# EAGLE board 14145^2 (EAGLE 7.5.0)
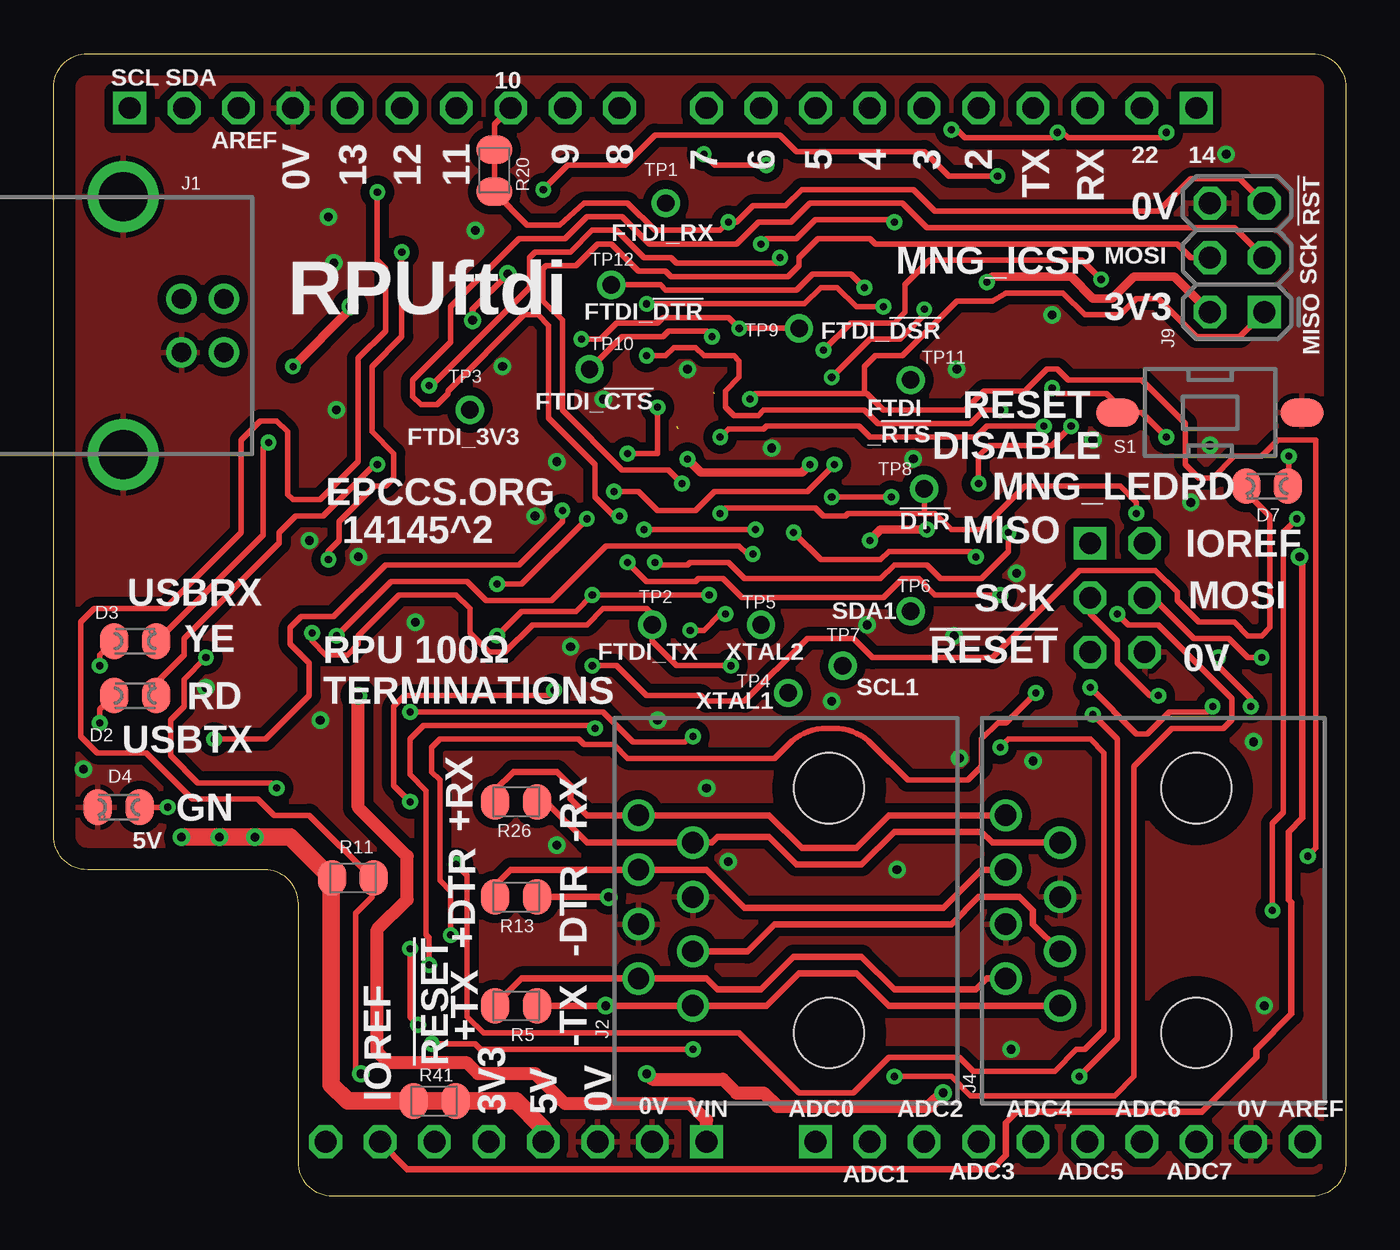
[diagram p0: board, top side]
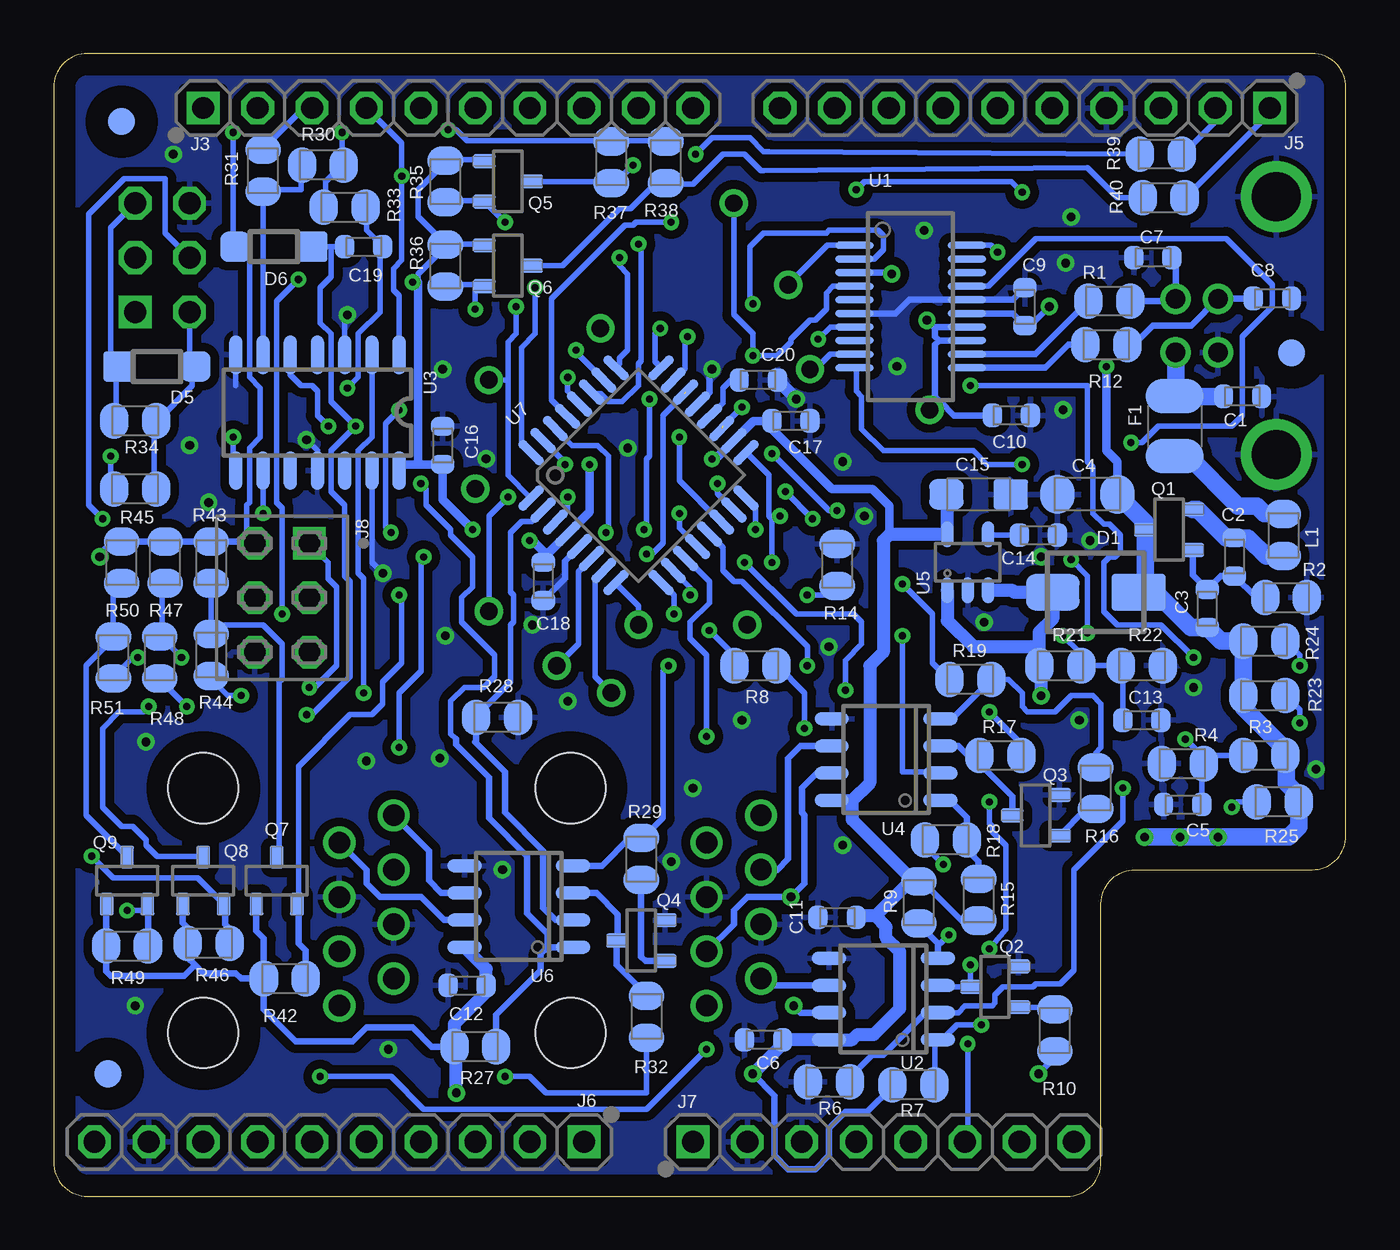
[diagram p1: board, bottom side, seen from below]

Size 60.33 x 53.34 mm. Coordinates in mm from the lower left corner, seen from the top.
Outline: 60.33,51.75 60.33,1.59 arc-90 58.74,0 13.02,0 arc-90 11.43,1.59 11.43,13.65 arc90 9.84,15.24 1.59,15.24 arc-90 0,16.83 0,51.75 arc-90 1.59,53.34 58.74,53.34 arc-90 60.33,51.75
Copper layers (1*16): Top 0.034290625mm / dielectric 60mil / Bottom 0.034290625mm
Design rules "default *": minimum track width 10mil, minimum drill 13mil, track to track 8mil, track to pad 8mil, pad to pad 8mil, via to via 8mil, smd to smd 8mil, copper to edge 40mil, drill to drill 12mil, minimum pad ring 10mil, minimum via ring 8mil, stop-mask expansion 4mil, vias tented up to drill 17mil, thermal gap 10mil
Net classes: 0 default: width 0.254 mm, drill 0.33 mm

## Footprints (pad centres in the part's own frame; a part is rotated, then mirrored left to right if it is on the bottom)
C0603(1608) = smd 0.898 x 1.1: 1 -0.889,0; 2 0.889,0
C1206(3216) = smd 1.6 x 1.8: 1 -1.4,0; 2 1.4,0
3216 = smd 1.6 x 1.4: + -1.5,0; - 1.5,0
SMA = smd 2.5 x 1.7: A 2,0; K -2,0
C0805(2012) = smd 1.321 x 1.651: A 0.977,0; K -0.977,0
SOD123 = smd 1.4 x 1.4: A 1.8,0; C -1.8,0
C1210(3225) = smd 1.6 x 2.7: 1 -1.4,0; 2 1.4,0
USB-B-PTH = drill 0.914: 1 1.981,-1.25; 2 1.981,1.25; 3 0,1.25; 4 0,-1.25 | drill 2.286: S1 -2.718,-6.02; S2 -2.718,6.02
RJ45-8HZT = drill 1: 1 -4.445,6.35; 2 -3.175,8.89; 3 -1.905,6.35; 4 -0.635,8.89; 5 0.635,6.35; 6 1.905,8.89; 7 3.175,6.35; 8 4.445,8.89 | hole 3.264: -5.715,0; 5.715,0
1X10 = drill 1.016 square: 1 0,0 | drill 1.016 octagon: 2 2.54,0; 3 5.08,0; 4 7.62,0; 5 10.16,0; 6 12.7,0; 7 15.24,0; 8 17.78,0; 9 20.32,0; 10 22.86,0
1X8 = drill 1.016 square: 1 0,0 | drill 1.016 octagon: 2 2.54,0; 3 5.08,0; 4 7.62,0; 5 10.16,0; 6 12.7,0; 7 15.24,0; 8 17.78,0
F2X3 = drill 1.016 square: 1 0,0 | drill 1.016 octagon: 2 0,-2.54; 3 2.54,0; 4 2.54,-2.54; 5 5.08,0; 6 5.08,-2.54
ISP = drill 1.016 square: 1 0,0 | drill 1.016 octagon: 2 0,2.54; 3 2.54,0; 4 2.54,2.54; 5 5.08,0; 6 5.08,2.54
C0805(2012)' = smd 1.321 x 1.651: 1 -0.977,0; 2 0.977,0
SOT23 = smd 0.65 x 1.06: 1(G) -0.95,-1.1; 2(S) 0.95,-1.1; 3(D) 0,1.1
SMD-DIPSWITCH-1 = smd 1.3 x 2: 1 0,-4.3; 2 0,4.3
P1-08 = drill 0.813: TP 0,0
20SSOP = smd 0.33 x 1.8: 1 -2.857,-2.625; 2 -2.223,-2.625; 3 -1.587,-2.625; 4 -0.953,-2.625; 5 -0.318,-2.625; 6 0.318,-2.625; 7 0.953,-2.625; 8 1.587,-2.625; 9 2.223,-2.625; 10 2.857,-2.625; 11 2.857,2.625; 12 2.223,2.625; 13 1.587,2.625; 14 0.953,2.625; 15 0.318,2.625; 16 -0.318,2.625; 17 -0.953,2.625; 18 -1.587,2.625; 19 -2.223,2.625; 20 -2.857,2.625
SOIC8 = smd 0.6 x 1.6: 1 -1.905,-2.54; 2 -0.635,-2.54; 3 0.635,-2.54; 4 1.905,-2.54; 5 1.905,2.54; 6 0.635,2.54; 7 -0.635,2.54; 8 -1.905,2.54
14SOIC = smd 0.6 x 1.8: 1 -3.81,-2.7; 2 -2.54,-2.7; 3 -1.27,-2.7; 4 0,-2.7; 5 1.27,-2.7; 6 2.54,-2.7; 7 3.81,-2.7; 8 3.81,2.7; 9 2.54,2.7; 10 1.27,2.7; 11 0,2.7; 12 -1.27,2.7; 13 -2.54,2.7; 14 -3.81,2.7
SOT23-5,SOT25 = smd 0.55 x 1.2: 1 -0.95,-1.3; 2 0,-1.3; 3 0.95,-1.3; 4 0.95,1.3; 5 -0.95,1.3
TQFP32-08 = smd 1.5 x 0.45: 1 -4.293,2.8; 2 -4.293,2; 3 -4.293,1.2; 4 -4.293,0.4; 5 -4.293,-0.4; 6 -4.293,-1.2; 7 -4.293,-2; 8 -4.293,-2.8; 17 4.293,-2.8; 18 4.293,-2; 19 4.293,-1.2; 20 4.293,-0.4; 21 4.293,0.4; 22 4.293,1.2; 23 4.293,2; 24 4.293,2.8 | smd 0.45 x 1.5: 9 -2.8,-4.293; 10 -2,-4.293; 11 -1.2,-4.293; 12 -0.4,-4.293; 13 0.4,-4.293; 14 1.2,-4.293; 15 2,-4.293; 16 2.8,-4.293; 25 2.8,4.293; 26 2,4.293; 27 1.2,4.293; 28 0.4,4.293; 29 -0.4,4.293; 30 -1.2,4.293; 31 -2,4.293; 32 -2.8,4.293
FIDUCIAL-1.27 = smd 1.27 x 1.27: 1 0,0

## Placement (x,y rotation side)
C1  0.1uF  [C0603(1608)]  4.83,37.34 0 bottom
C2  0.1uF  [C0603(1608)]  5.21,29.84 270 bottom
C3  0.022uF  [C0603(1608)]  6.48,27.43 90 bottom
C4  4.7uF  [C1206(3216)]  12.06,32.77 180 bottom
C5  0.1uF  [C0603(1608)]  7.62,18.29 180 bottom
C6  .1uF  [C0603(1608)]  27.18,7.3 180 bottom
C7  47pF  [C0603(1608)]  9.02,43.81 180 bottom
C8  47pF  [C0603(1608)]  3.43,41.91 0 bottom
C9  0.1uF  [C0603(1608)]  14.99,41.53 90 bottom
C10  0.1uF  [C0603(1608)]  15.62,36.45 0 bottom
C11  .1uF  [C0603(1608)]  23.75,13.02 180 bottom
C12  .1uF  [C0603(1608)]  41.02,9.84 180 bottom
C13  0.1uF  [C0603(1608)]  9.53,22.23 0 bottom
C14  470pF  [C0603(1608)]  14.35,30.86 0 bottom
C15  10uF  [3216]  17.14,32.77 0 bottom
C16  .1uF  [C0603(1608)]  42.16,35.05 90 bottom
C17  .1uF  [C0603(1608)]  25.91,36.2 0 bottom
C18  .1uF  [C0603(1608)]  37.47,28.7 270 bottom
C19  .1uF  [C0603(1608)]  45.85,44.32 180 bottom
C20  .1uF  [C0603(1608)]  27.43,38.1 0 bottom
D1  SQ4  [SMA]  11.68,28.19 0 bottom
D2  0805RD  [C0805(2012)]  3.81,23.37 180 top
D3  0805YE  [C0805(2012)]  3.81,25.91 180 top
D4  0805GN  [C0805(2012)]  3.05,18.16 0 top
D5  T4  [SOD123]  55.5,38.73 180 bottom
D6  T4  [SOD123]  50.04,44.32 0 bottom
D7  0805RD  [C0805(2012)]  56.64,33.15 0 top
F1  M  [C1210(3225)]  8,35.94 270 bottom
J1  B  [USB-B-PTH]  5.97,40.64 0 top
J2  RJ45J  [RJ45-8HZT]  36.2,13.34 90 top
J3  PBC10SAAN  [1X10]  53.34,50.8 0 bottom
J4  RJ45J  [RJ45-8HZT]  53.34,13.34 90 top
J5  PBC10SAAN  [1X10]  3.56,50.8 180 bottom
J6  PBC10SAAN  [1X10]  35.56,2.54 180 bottom
J7  PBC08SAAN  [1X8]  30.48,2.54 0 bottom
J8  PPPC032LFBN  [F2X3]  48.39,30.48 270 bottom
J9  [ISP]  56.52,41.27 90 top
L1  MH2029-300Y  [C0805(2012)']  2.92,30.86 270 bottom
Q1  DMB  [SOT23]  8.26,31.11 90 bottom
Q2  K38  [SOT23]  16.38,9.78 90 bottom
Q3  K38  [SOT23]  14.48,17.78 90 bottom
Q4  K38  [SOT23]  32.89,11.94 90 bottom
Q5  K38  [SOT23]  39.12,47.37 270 bottom
Q6  K38  [SOT23]  39.12,43.43 270 bottom
Q7  K38  [SOT23]  49.91,14.73 0 bottom
Q8  K38  [SOT23]  53.34,14.73 0 bottom
Q9  K38  [SOT23]  56.9,14.73 0 bottom
R1  27  [C0805(2012)']  11.05,41.78 180 bottom
R2  5.62k  [C0805(2012)']  2.79,27.94 0 bottom
R3  100k  [C0805(2012)']  3.81,20.57 0 bottom
R4  10k  [C0805(2012)']  7.62,20.19 180 bottom
R5  100  [C0805(2012)']  21.59,8.89 0 top
R6  3.01k  [C0805(2012)']  24.13,5.33 0 bottom
R7  10k  [C0805(2012)']  20.19,5.21 180 bottom
R8  3.01k  [C0805(2012)']  27.56,24.77 180 bottom
R9  10K  [C0805(2012)']  19.94,13.72 270 bottom
R10  100  [C0805(2012)']  13.59,7.75 270 bottom
R11  OPEN  [C0805(2012)']  13.97,14.86 0 top
R12  27  [C0805(2012)']  11.18,39.75 180 bottom
R13  100  [C0805(2012)']  21.59,13.97 0 top
R14  3.01k  [C0805(2012)']  23.75,29.46 270 bottom
R15  10k  [C0805(2012)']  17.14,13.84 270 bottom
R16  100  [C0805(2012)']  11.68,19.05 90 bottom
R17  3.01k  [C0805(2012)']  16.13,20.57 0 bottom
R18  1.5k  [C0805(2012)']  18.67,16.64 180 bottom
R19  1.5k  [C0805(2012)']  17.53,24.13 180 bottom
R20  JMP  [C0805(2012)']  20.57,47.88 90 top
R21  200k  [C0805(2012)']  13.34,24.77 0 bottom
R22  10k  [C0805(2012)']  9.53,24.77 0 bottom
R23  1.5k  [C0805(2012)']  3.81,23.37 180 bottom
R24  1.5k  [C0805(2012)']  3.81,25.91 180 bottom
R25  1.5k  [C0805(2012)']  3.17,18.41 0 bottom
R26  100  [C0805(2012)']  21.59,18.41 0 top
R27  10k  [C0805(2012)']  40.64,6.99 180 bottom
R28  3.01k  [C0805(2012)']  39.62,22.35 0 bottom
R29  100  [C0805(2012)']  32.89,15.75 270 bottom
R30  10K  [C0805(2012)']  47.75,48.13 180 bottom
R31  180  [C0805(2012)']  50.55,47.88 270 bottom
R32  3.01k  [C0805(2012)']  32.64,8.38 90 bottom
R33  100k  [C0805(2012)']  46.74,46.16 180 bottom
R34  10K  [C0805(2012)']  56.52,36.2 0 bottom
R35  10k  [C0805(2012)']  42.04,47.37 270 bottom
R36  10k  [C0805(2012)']  42.04,43.43 270 bottom
R37  10k  [C0805(2012)']  34.29,48.26 270 bottom
R38  10k  [C0805(2012)']  31.75,48.26 270 bottom
R39  180  [C0805(2012)']  8.64,48.64 0 bottom
R40  180  [C0805(2012)']  8.51,46.61 0 bottom
R41  JMP  [C0805(2012)']  17.78,4.45 180 top
R42  10k  [C0805(2012)']  49.53,10.16 0 bottom
R43  10k  [C0805(2012)']  52.96,29.59 270 bottom
R44  180  [C0805(2012)']  52.96,25.27 270 bottom
R45  1.5k  [C0805(2012)']  56.52,33.02 180 bottom
R46  10k  [C0805(2012)']  53.09,11.81 0 bottom
R47  10k  [C0805(2012)']  55.12,29.59 270 bottom
R48  180  [C0805(2012)']  55.37,25.15 270 bottom
R49  10k  [C0805(2012)']  56.9,11.68 0 bottom
R50  10k  [C0805(2012)']  57.15,29.59 270 bottom
R51  180  [C0805(2012)']  57.53,25.15 270 bottom
S1  SMDIP1S  [SMD-DIPSWITCH-1]  53.98,36.58 90 top
TP1  TPPAD1-08  [P1-08]  28.57,46.35 0 top
TP2  TPPAD1-08  [P1-08]  27.94,26.67 0 top
TP3  TPPAD1-08  [P1-08]  19.43,36.7 0 top
TP4  TPPAD1-08  [P1-08]  34.29,23.5 0 top
TP5  TPPAD1-08  [P1-08]  33.02,26.67 0 top
TP6  TPPAD1-08  [P1-08]  40.01,27.3 0 top
TP7  TPPAD1-08  [P1-08]  36.83,24.77 0 top
TP8  TPPAD1-08  [P1-08]  40.64,33.02 0 top
TP9  TPPAD1-08  [P1-08]  34.8,40.51 0 top
TP10  TPPAD1-08  [P1-08]  25.02,38.61 0 top
TP11  TPPAD1-08  [P1-08]  40.01,38.1 0 top
TP12  TPPAD1-08  [P1-08]  26.04,42.55 0 top
U1  FT231X  [20SSOP]  20.32,41.53 270 bottom
U2  3172EIBZ  [SOIC8]  21.59,9.21 90 bottom
U3  74LVC07A  [14SOIC]  48.01,36.58 180 bottom
U4  3172EIBZ  [SOIC8]  21.46,20.38 90 bottom
U5  KB33  [SOT23-5,SOT25]  17.65,29.59 0 bottom
U6  3172EIBZ  [SOIC8]  38.61,13.53 90 bottom
U7  ATMEGA328P-AU  [TQFP32-08]  33.02,33.66 45 bottom
U$1  ARDUINO-UNO  [ARDUINO_UNO]  -15.24,0 0 top  (outside the outline)
U$2  FIDUCIAL1.27  [FIDUCIAL-1.27]  57.15,50.16 0 bottom
U$3  FIDUCIAL1.27  [FIDUCIAL-1.27]  2.54,39.37 0 bottom
U$4  FIDUCIAL1.27  [FIDUCIAL-1.27]  57.78,5.71 0 bottom

## Library data of the parts
C1-C14 C16-C20 = C-C
C15 = C-T
D1 = D-SBR
D2-D4 D7 = D-LED
D5 D6 = D-GP
F1 = F-RST
J1 = J-USB
J2 J4 = J-RJ45
J3 J5-J8 = J-HDR2.54mm
J9 U7 = U-AVR
L1 = L-FB
Q1 = Q-PCH
Q2-Q9 = Q-NCH
R1-R51 = R-C
S1 = S-Toggle
TP1-TP12 = J-TP
U1 U2 U4 U6 = U-Transceiver
U3 = U-7400
U5 = P-DCDC
U$1 = J-BoardHDR
U$2-U$4 = H-Fiducial

## Nets
0V: C1.2 C4.2 C5.2 C6.2 C7.2 C8.2 C9.2 C10.2 C11.2 C12.2 C13.2 C14.2 C15.- C16.2 C17.2 C18.2 C20.2 D4.K J1.4 J1.S1 J1.S2 J2.4 J2.5 J4.4 J4.5 J5.4 J6.9 J7.2 J7.3 J8.6 J9.6 Q2.2(S) Q3.2(S) Q4.2(S) R2.2 R4.2 R6.1 R14.1 R22.2 R28.2 S1.1 U1.6 U1.16 U2.5 U3.3 U3.7 U3.11 U3.13 U4.5 U5.2 U6.5 U7.5 U7.21
!DTR!: TP8.TP U3.9 U7.12
+3V3: C6.1 C11.1 C12.1 C15.+ C16.1 C17.1 C18.1 D5.C J9.2 Q5.1(G) Q6.1(G) Q7.1(G) Q8.1(G) Q9.1(G) R7.2 R9.1 R15.2 R27.2 R34.2 R35.1 R36.1 R42.1 R45.1 R46.1 R49.1 U2.8 U3.14 U4.8 U5.5 U6.8 U7.4 U7.18
+5V: C3.1 C4.1 C9.1 D1.A J7.4 Q1.3(D) R3.2 R11.1 R23.2 R24.2 R25.2 R41.1 R41.2 U1.15
+DTR: J2.6 J4.6 R13.1 U4.6
+RX: J2.8 J4.8 R26.1 U6.6
+TX: J2.2 J4.2 R5.1 U2.6
-DTR: J2.3 J4.3 R13.2 U4.7
-RX: J2.7 J4.7 R26.2 U6.7
-TX: J2.1 J4.1 R5.2 U2.7
BRD_MISO: J8.1 R48.2
BRD_MOSI: J8.4 R51.2
BRD_SCK: J8.3 R44.2
CCRST: C19.1 R33.1 S1.2 U3.8
D+: C8.1 J1.3 R12.1
D-: C7.1 J1.2 R1.1
DTR_!RE: R14.2 U4.2 U7.10
DTR_DE: R17.2 U7.11
DTR_RXD: R18.2 U7.30
DTR_TXD: R19.2 U7.31
FT3V3: C10.1 TP3.TP U1.3 U1.13 U1.14
FTDI_!CTS: TP10.TP U1.9 U7.23
FTDI_!DSR: TP9.TP U1.7 U7.24
FTDI_!DTR: TP12.TP U1.1 U7.32
FTDI_!RTS: TP11.TP U1.2 U7.1
FTDI_RX: R7.1 TP1.TP U1.4 U2.1
FTDI_TX: R29.1 TP2.TP U1.20 U6.4
IOREF: D6.C J7.7 J8.2 R30.1 R33.2 R37.1 R38.1 R43.1 R47.1 R50.1
LED_BUILTIN: D7.K U7.13
MGR_!RESET: D5.A J5.8 J9.5 R20.1 R20.2 R34.1 U7.29
MISO: J9.1 Q8.2(S) R46.2 U7.16
MOSI: J9.4 Q9.2(S) R49.2 U7.15
N$1: Q6.3(D) R38.2 R40.1
N$2: Q5.3(D) R37.2 R39.1
N$3: TP4.TP U7.7
N$4: C1.1 F1.1 J1.1
N$5: F1.2 L1.1
N$6: D3.A R24.1
N$7: D2.K U1.10
N$8: D3.K U1.17
N$9: TP5.TP U7.8
N$10: R30.2 R31.2 U3.6
N$11: Q4.3(D) R32.2 U6.3
N$12: R1.2 U1.12
N$13: R12.2 U1.11
N$14: D4.A R25.1
N$15: Q2.1(G) R10.1
N$16: D2.A R23.1
N$18: Q2.3(D) R8.1 U2.3
N$19: R15.1 R18.1 U4.1
N$20: Q3.3(D) R17.1 U4.3
N$21: R16.2 R19.1 U4.4
N$22: Q3.1(G) R16.1
N$23: Q7.3(D) R43.2 R44.1
N$24: C14.1 U5.4
N$25: Q4.1(G) R29.2
N$26: C2.1 L1.2 Q1.2(S)
N$27: C2.2 C3.2 Q1.1(G) R2.1
N$29: D7.A R45.2
N$30: Q9.3(D) R50.2 R51.1
N$33: Q8.3(D) R47.2 R48.1
RPU_AREF: C20.1 U7.20
RX: J3.3 R31.1
RX_!RE: R28.1 U6.2 U7.2
RX_DE: R32.1 U7.26
RX_RPU: R27.1 U3.5 U6.1
SCK: J9.3 Q7.2(S) R42.2 U7.17
SCL: J5.1 R40.2
SCL0: Q6.2(S) R36.2 U7.28
SCL1: TP7.TP U7.6
SDA: J5.2 R39.2
SDA0: Q5.2(S) R35.2 U7.27
SDA1: TP6.TP U7.3
SS: C19.2 D6.A J7.6 U7.14
TX: J3.4 R10.2 R11.2 U3.1
TX_!RE: R6.2 U2.2 U7.25
TX_DE: R8.2 U7.9
TX_RPU: R9.2 U2.4 U3.2
USB5V_ADC6: C5.1 R3.1 R4.1 U7.19
VIN: D1.K J7.1 R21.1 U5.1 U5.3
VIN_ADC7: C13.1 R21.2 R22.1 U7.22

## Tracks (layer width: path | path; a pad name or v marks a point on that pad's centre or on a via)
0V  (via drill 0.41)
  Bottom 0.254: U3.7 51.82,37.85 | U3.3 46.74,41.02 v46.61,41.15 | U3.11 48.01,34.8 v48.51,35.31 | U3.13 45.47,29.59 v44.96,29.08
  Bottom 0.305: C9.2 15.56,41.85 U1.16 20.38,41.85 21.02,41.21 U1.6 | U7.5 36.45,29.66 36.45,28.83 C18.2 | U7.21 29.72,37.52 29.72,38.48 v29.59,38.61
  Bottom 0.61: C20.2 v25.65,37.21
  other vias: 14.22,29.84 16.89,26.8 12.45,22.23 13.21,36.7 11.94,30.61 7.11,23.75 20.95,38.73 23.5,34.29 22.48,31.75 12.83,45.72 19.68,45.09 1.4,19.94 24.13,25.65 28.19,22.23 37.97,26.67 30.48,19.05 36.32,23.11 42.29,20.45 45.72,20.32 39.37,15.24 56.52,8.89 56.01,21.21 53.98,35.05 54.74,48.64 53.09,32.38 42.16,38.61 42.04,26.16 40.13,34.42 33.53,34.92 13.08,43.56 31.5,15.62 23.5,16.38 44.7,6.86
  pour Top (isolate 0.406): 10.79,0 10.79,14.61 0,14.61 0,53.34 60.33,53.34 60.33,0
  pour Bottom (isolate 0.406): 0,53.34 60.33,53.34 60.33,0 10.79,0 10.79,14.61 0,14.61
!DTR!  (via drill 0.33)
  Top 0.254: v50.55,31.88 50.55,32.38 49.78,33.15 45.34,33.15 43.31,31.11 41.91,31.11 41.15,31.88 40.64,31.88 | 40.64,31.88 37.08,31.88 36.96,31.75 35.94,31.75 35.56,32.13 31.37,32.13 v31.11,31.88 | TP8.TP 40.64,31.88
  Bottom 0.254: U3.9 v50.55,31.88 | U7.12 31.11,31.18 v31.11,31.88
+3V3  (via drill 0.33, 0.41)
  Top 0.406: v38.1,30.61 38.61,31.11 v40.77,31.11 | v43.56,42.67 43.81,42.93 47.5,42.93 48.51,41.91 49.4,41.91 50.42,42.93 52.32,42.93 J9.2 | v29.59,34.42 30.23,33.78 34.92,33.78 v35.31,34.16
  Top 0.61: v27.69,5.71 27.94,5.46 31.24,5.46 31.88,4.83 33.15,4.83 33.78,4.19 40.89,4.19 v41.53,4.83
  Bottom 0.254: R45.1 55.63,33.02 55.63,36.2 R34.2 55.5,36.2 53.85,37.85 53.85,38.73 D5.C 53.72,38.73 53.98,38.99 J9.2 | 42.04,44.45 40.26,44.45 Q6.1(G) | Q5.1(G) 40.26,48.39 42.04,48.39 R35.1 42.04,48.26 43.31,46.99 43.31,45.72 42.04,44.45 | 42.04,44.45 R36.1 42.04,44.32 43.31,43.05 43.31,42.67 | U3.14 44.2,34.16 | 37.34,29.97 37.21,29.84 C18.1
  Bottom 0.305: R27.2 42.67,6.99 43.56,7.87 45.72,7.87 46.35,7.24 49.02,7.24 50.51,8.72 R42.1 | R42.1 50.51,12.03 50.86,12.38 Q7.1(G) | 53.72,10.79 54.06,11.14 R46.1 54.06,12.53 54.29,12.76 Q8.1(G) | 53.72,10.79 53.34,10.41 51.82,10.41 51.56,10.16 R42.1 | 53.72,10.79 54.23,10.29 57.66,10.29 57.87,10.5 R49.1 57.87,13.61 Q9.1(G) | R9.1 19.77,14.69 17.91,12.83 17.18,12.83 R15.2 | R7.2 21.17,5.12 22.35,3.94 23.37,3.94 24.13,3.17 24.13,1.91 24.77,1.27 26.04,1.27 26.67,1.91 26.67,4.7 v27.69,5.71 | 37.27,29.97 37.34,29.97
  Bottom 0.406: 21.31,30.89 21.31,32.23 22.1,33.02 24,33.02 26.8,35.81 C17.1 27.65,36.2 U7.18 29.43,34.42 v29.59,34.42 | 44.2,34.16 43.31,34.16 | 43.31,34.16 C16.1 42.16,32.51 v40.77,31.11 | v38.1,30.61 37.97,30.61 37.34,29.97 | 43.31,34.16 43.31,42.67 v43.56,42.67 | v35.31,34.16 35.31,31.93 U7.4 37.27,29.97
  Bottom 0.61: C15.+ 18.6,32.72 U5.5 21.31,30.89 21.59,30.61 21.59,25.4 22.23,24.77 22.23,19.3 23.05,18.48 | U4.8 23.05,18.48 | 23.05,18.48 23.05,17.59 20.15,14.69 | R9.1 20.15,14.69 | 20.15,14.69 20.36,14.69 21.97,13.08 | 21.97,13.08 22.8,13.08 C11.1 | 21.97,13.08 21.46,12.57 21.46,12.06 20.83,11.43 20.83,8.76 22.04,7.56 22.8,7.56 23.05,7.3 U2.8 C6.1 26.29,7.11 v27.69,5.71 | v41.53,4.83 41.53,6.9 R27.2 41.62,8.04 40.13,9.53 C12.1 40.13,10.6 U6.8
+5V  (via drill 0.33, 0.41)
  Top 0.254: 13.08,14.86 R11.1 12.95,14.86 | 13.84,41.4 v13.84,41.53
  Top 0.406: 13.84,41.4 v11.18,38.73
  Top 0.813: v5.97,16.76 v7.75,16.76 v9.4,16.76 11.05,16.76 12.95,14.86 12.95,5.21 13.72,4.45 R41.2 R41.1 21.59,4.45 22.86,3.17 J7.4
  Bottom 0.305: U1.15 15.56,41.21 C9.1 14.73,40.64 v13.84,41.53 | C4.1
  Bottom 0.406: v11.18,38.73 11.18,34.8 10.67,34.29 C4.1
  Bottom 0.813: v9.4,16.76 2.67,16.76 2.2,17.23 R25.2 2.2,18.71 2.79,19.3 2.79,20.45 2.83,20.49 R3.2 2.83,20.87 4.79,22.82 R23.2 R24.2 5.84,25.91 C3.1 7.24,26.54 8.89,28.19 9.14,28.19 | 9.14,28.19 D1.A | 9.14,28.19 9.36,28.41 Q1.3(D) 9.36,31.46 C4.1
+DTR
  Top 0.305: J4.6 43.31,15.24 41.53,13.46 32.26,13.46 30.48,15.24 J2.6 21.34,15.24 20.61,14.52 R13.1
  Bottom 0.305: U4.6 25.46,21.02 26.04,20.45 26.04,15.75 26.54,15.24 J2.6
+RX
  Top 0.305: J4.8 38.99,17.78 37.47,16.26 34.92,16.26 33.4,17.78 J2.8 24.89,17.78 24.13,18.54 24.13,19.18 23.5,19.81 21.46,19.81 20.61,18.96 R26.1
  Bottom 0.305: U6.6 42.23,14.16 42.8,14.73 42.8,16.13 J4.8
+TX
  Top 0.305: R5.1 20.61,8.93 21.84,10.16 J2.2 30.48,10.16 30.99,9.65 33.02,9.65 34.54,11.18 37.72,11.18 39.24,9.65 43.05,9.65 43.56,10.16 J4.2
  Bottom 0.305: U2.6 26.99,9.84 J2.2
-DTR  (via drill 0.41)
  Top 0.305: J4.3 45.72,12.7 45.72,13.34 45.09,13.97 43.18,13.97 41.91,12.7 33.66,12.7 32.38,11.43 J2.3 | R13.2 v25.91,13.97
  Bottom 0.305: U4.7 24.7,19.75 25.4,19.05 25.4,17.91 25.27,17.78 25.27,14.61 v25.91,13.97 27.94,13.97 28.57,13.34 28.57,12.7 J2.3
-RX
  Top 0.305: J4.7 43.81,16.51 43.31,17.02 39.24,17.02 37.72,15.49 34.67,15.49 33.4,16.76 30.99,16.76 30.73,16.51 J2.7 24.89,16.51 22.99,18.41 R26.2
  Bottom 0.305: U6.7 42.1,12.89 43.18,13.97 45.09,13.97 45.72,14.61 45.72,15.24 J4.7
-TX  (via drill 0.41)
  Top 0.305: R5.2 v25.78,8.89 J2.1 33.27,8.89 34.8,10.41 37.47,10.41 38.99,8.89 J4.1
  Bottom 0.305: U2.7 25.46,8.57 v25.78,8.89
BRD_MISO  (via drill 0.33)
  Top 0.254: v54.1,22.86 53.85,22.61 52.07,22.61 51.05,21.59 50.55,21.59 v48.39,23.75
  Bottom 0.254: v54.1,22.86 55.37,24.13 R48.2 | v48.39,23.75 48.13,23.75 47.12,24.77 47.12,28.45 47.5,28.83 47.5,29.59 J8.1
BRD_MOSI  (via drill 0.33)
  Top 0.254: v56.39,25.15 55.75,25.15 54.86,26.04 53.21,26.04 51.31,27.94 J8.4
  Bottom 0.254: v56.39,25.15 56.64,25.15 57.53,24.26 R51.2
BRD_SCK  (via drill 0.33)
  Top 0.254: v51.56,23.37 51.18,23.37 49.66,24.89 49.66,25.91 48.39,27.18 J8.3
  Bottom 0.254: R44.2 52.96,24.13 52.2,23.37 v51.56,23.37
CCRST  (via drill 0.33)
  Top 0.254: v51.94,35.43 50.8,36.58 S1.2 49.66,36.96 49.15,37.47 46.86,37.47 v46.61,37.72
  Bottom 0.254: R33.1 45.72,46.1 45.72,45.09 C19.1 45.09,44.32 45.09,41.27 46.1,40.26 46.1,38.23 v46.61,37.72 | v51.94,35.43 51.94,34.04 51.82,33.91 U3.8
D+
  Bottom 0.305: R12.1 9.91,39.75 9.02,40.64 7.22,40.64 J1.3 4.34,41.89 C8.1
D-
  Bottom 0.305: R1.1 8.06,41.78 J1.2 7.95,43.64 C7.1
DTR_!RE  (via drill 0.33)
  Top 0.254: v30.61,28.07 v25.15,28.07 24.38,27.3 21.84,27.3 v20.7,26.16
  Bottom 0.254: 30.61,28.32 v30.61,28.07 30.61,28.41 U7.10 | v25.15,28.07 23.75,28.07 R14.2 | v20.7,26.16 20.7,19.81 18.92,19.81 U4.2
DTR_DE  (via drill 0.33)
  Top 0.254: v16.64,22.61 25.65,22.61 27.05,21.21 29.46,21.21 29.72,21.46 v29.84,21.46
  Bottom 0.254: v29.84,21.46 29.84,25.27 30.61,26.04 30.61,26.8 29.72,27.69 29.72,28.7 30.73,29.72 U7.11 | v16.64,22.61 15.24,21.21 R17.2
  Bottom 0.305: R17.2 15.15,21.12
DTR_RXD  (via drill 0.33)
  Top 0.254: v34.54,30.99 35.81,29.72 38.61,29.72 38.99,30.1 42.8,30.1 v43.05,29.84 | v44.2,20.95 44.58,21.34 48.39,21.34 49.02,20.7 49.02,7.75 48.13,6.86 47.75,6.86 46.74,5.84 42.93,5.84 42.29,6.48 38.99,6.48 37.34,4.83 34.8,4.83 32,7.62 20.07,7.62 19.3,8.38 19.3,14.99 v18.8,15.49
  Bottom 0.254: v34.54,30.99 34.42,31.11 34.42,34.54 34.92,35.05 36.11,35.05 U7.30 | v43.05,29.84 43.18,29.72 43.18,24.51 44.2,23.5 v44.2,20.95 | v18.8,15.49 19.56,16.26 19.56,16.64 R18.2
DTR_TXD  (via drill 0.33)
  Top 0.254: v36.45,34.16 35.18,32.89 30.86,32.89 29.97,32 28.19,32 27.3,32.89 v26.16,32.89 | v24.89,31.62 21.84,28.57 v20.7,28.57
  Bottom 0.254: v24.89,31.62 v26.16,32.89 | v20.7,28.57 19.3,27.18 19.3,24.89 18.54,24.13 R19.2 | U7.31 36.45,34.26 v36.45,34.16
FT3V3  (via drill 0.41)
  Top 0.305: v19.56,40.89 19.56,41.4 v21.21,43.05
  Bottom 0.254: TP3.TP 19.3,36.7 18.92,37.08
  Bottom 0.305: C10.1 18.29,36.45 18.92,37.08 19.18,37.34 19.18,39.75 18.99,39.94 | U1.13 18.99,39.94 | U1.14 19.11,40.58 19.18,40.51 | 19.18,40.51 19.18,40.13 18.99,39.94 | 19.18,40.51 v19.56,40.89 | U1.3 21.27,43.12 v21.21,43.05
FTDI_!CTS  (via drill 0.33)
  Top 0.254: v30.73,40.13 30.48,40.39 28.7,40.39 28.45,40.13 26.54,40.13 TP10.TP
  Bottom 0.254: U7.23 30.86,38.64 30.86,40.01 v30.73,40.13 | U1.9 24.07,39.31 24.77,38.61 TP10.TP
FTDI_!DSR  (via drill 0.33)
  Top 0.254: v24.64,40.01 25.53,40.01 26.29,40.77 28.19,40.77 28.45,41.02 31.5,41.02 v32,40.51 TP9.TP
  Bottom 0.254: U7.24 32.26,38.96 32.26,40.26 v32,40.51 | U1.7 24.07,40.58 v24.64,40.01
FTDI_!DTR  (via drill 0.33)
  Top 0.254: TP12.TP 28.32,42.55 28.57,42.29 34.67,42.29 35.43,43.05 37.21,43.05 v37.85,42.42
  Bottom 0.254: v37.85,42.42 37.85,40.26 38.48,39.62 38.48,35.18 38.1,34.8 U7.32 | U1.1 24.19,44.39 TP12.TP
FTDI_!RTS  (via drill 0.33)
  Top 0.254: v27.69,41.66 35.05,41.66 35.81,42.42 36.58,42.42 37.47,41.53 v38.73,41.53
  Bottom 0.254: v38.73,41.53 38.73,40.26 39.12,39.88 39.12,38.1 | 39.12,38.1 39.12,33.66 38.1,32.64 U7.1 | v27.69,41.66 27.81,41.78 27.81,44.32 27.18,44.96 24.26,44.96 24.13,45.09 21.84,45.09 21.59,44.83 21.59,44.2 22.04,43.75 U1.2 | TP11.TP 39.12,38.1
FTDI_RX  (via drill 0.33)
  Top 0.254: v27.69,39.24 28.57,39.24 28.96,39.62 29.97,39.62 30.35,39.24 31.75,39.24 32,38.99 32,38.23 31.37,37.59 31.37,36.83 31.75,36.45 32.89,36.45 33.15,36.7 37.85,36.7 38.48,36.07 42.8,36.07 43.43,36.7 v44.2,36.7 | v44.58,30.99 44.58,30.1 43.31,28.83 41.4,28.83 40.77,29.46 39.24,29.46 38.61,28.83 32.26,28.83 31.5,29.59 29.72,29.59 29.59,29.46 28.19,29.46 v28.07,29.59 | v23.37,23.62 23.11,23.37 16.38,23.37 15.88,22.86 15.88,19.18 v16.64,18.41 | v16.64,11.56 16.64,8.38 v17.02,8
  Bottom 0.254: R7.1 19.18,5.21 19.18,7.11 19.05,7.24 U2.1 19.05,7.11 18.16,8 v17.02,8 | v44.2,36.7 44.83,36.07 44.83,31.24 v44.58,30.99 | v23.37,23.62 23.37,25.02 22.61,25.78 22.61,26.8 22.99,27.18 25.65,27.18 v28.07,29.59 | v16.64,18.41 16.64,17.4 16.51,17.27 16.51,17.02 15.88,16.38 15.88,12.45 v16.64,11.56 | U1.4 23.94,42.48 24.26,42.16 24.26,41.4 24.77,40.89 25.02,40.89 25.91,40.01 25.91,39.88 26.54,39.24 v27.69,39.24 27.69,40.26 28.57,41.15 TP1.TP
FTDI_TX  (via drill 0.33)
  Top 0.254: v16.26,44.07 16.26,40.13 14.86,38.73 14.86,35.69 15.88,34.67 15.88,33.53 15.49,33.15 14.99,33.15 13.34,31.5 13.34,30.61 12.83,30.1 v12.83,29.72 | v12.06,26.29 12.06,25.91 12.7,25.27 13.72,25.27 14.22,25.78 14.22,26.16 16.13,28.07 18.8,28.07 19.43,27.43 19.43,26.29 20.32,25.4 21.08,25.4 22.35,26.67 24.89,26.67 25.65,27.43 27.69,27.43 27.94,27.18 TP2.TP 27.94,26.16 27.94,25.91 29.08,24.77 v31.62,24.77
  Bottom 0.254: v12.83,29.72 12.06,28.96 v12.06,26.29 | v31.62,24.77 31.88,24.51 31.88,17.65 32.77,16.76 R29.1 | U1.20 16.57,44.39 v16.26,44.07
  Bottom 0.305: U6.4 34.73,15.43 33.44,16.73 R29.1
IOREF  (via drill 0.33, 0.41)
  Top 0.254: v41.91,49.78 42.16,49.78 42.55,49.4 46.61,49.4 v46.86,49.66 47.12,49.66 47.37,49.4 51.69,49.4 v51.94,49.66
  Top 0.305: J7.7 16.51,1.27 43.81,1.27 44.45,1.91 44.45,3.43 44.96,3.94 53.59,3.94 56.13,6.48 56.13,6.86 57.78,8.51 57.78,13.72 57.66,13.84 57.66,17.02 58.29,17.65 58.29,29.72 v58.17,29.84
  Bottom 0.254: J8.2 51.31,30.61 51.31,32.26 51.18,32.38 51.18,34.92 50.67,35.43 50.67,37.72 51.18,38.23 51.18,43.69 51.82,44.32 D6.C 51.94,44.32 v51.94,49.66 | 34.29,49.28 31.75,49.28 R38.1 | 46.86,48.13 47.62,47.37 47.62,46.23 R33.2 | 34.29,49.28 41.02,49.28 41.53,49.78 v41.91,49.78 | 46.86,48.13 v46.86,49.66 | 34.29,49.28 R37.1 | 46.86,48.13 R30.1
  Bottom 0.305: v58.17,29.84 58.17,29.97 57.57,30.57 R50.1 R47.1 R43.1 51.02,30.57 J8.2
LED_BUILTIN  (via drill 0.33)
  Top 0.254: v25.15,24.77 26.29,24.77 27.69,23.37 30.23,23.37 30.48,23.11 32.26,23.11 35.18,26.04 37.34,26.04 38.23,25.15 43.81,25.15 47.88,29.21 51.44,29.21 52.45,28.19 52.45,27.81 53.47,26.8 55.12,26.8 55.75,26.16 56.39,26.16 56.77,26.54 56.77,31.75 55.63,32.89 55.63,33.15 D7.K
  Bottom 0.254: v25.15,24.77 25.15,25.65 28.19,28.7 28.57,28.7 29.08,29.21 29.08,30.28 U7.13
MGR_!RESET  (via drill 0.33)
  Top 0.254: J9.5 55.37,47.5 53.09,47.5 51.56,45.97 41.15,45.97 40.13,46.99 34.92,46.99 34.16,46.23 32.64,46.23 31.88,45.47 v31.5,45.47 31.11,45.09 28.07,45.09 26.8,46.35 24.77,46.35 23.62,45.34 22.1,45.34 20.57,46.86 R20.1 R20.2 20.57,50.04 J5.8
  Bottom 0.254: 57.4,38.73 57.4,36.2 R34.1 | 57.4,38.73 57.66,38.99 57.66,45.21 J9.5 | 57.4,38.73 D5.A | v31.5,45.47 33.15,45.47 33.27,45.34 33.66,45.34 37.08,41.91 37.08,37.15 U7.29
MISO  (via drill 0.33)
  Top 0.254: v32.77,31.11 v27.56,31.11 | v32.51,37.21 32.77,37.47 37.85,37.47 | 37.85,37.47 37.97,37.47 38.73,36.7 42.55,36.7 43.43,37.59 45.34,37.59 46.35,38.61 46.86,38.61 47.37,38.1 50.8,38.1 52.83,36.07 52.83,34.16 53.47,33.53 54.1,33.53 55.12,34.54 56.39,34.54 57.15,35.31 58.93,35.31 58.93,16.26 v58.55,15.88 | 37.85,37.47 37.85,38.73 38.35,39.24 39.62,39.24 42.16,41.78 43.81,41.78 44.45,42.16 47.12,42.16 48.13,41.15 49.78,41.15 50.55,41.91 51.56,41.91 53.34,40.13 55.37,40.13 J9.1
  Bottom 0.254: v27.56,31.11 27.56,32.13 27.94,32.51 U7.16 | v32.77,31.11 32.64,31.24 32.64,34.42 32.51,34.54 v32.51,37.21 | v58.55,15.88 57.53,14.86 53.59,14.86 52.45,13.72 Q8.2(S)
  Bottom 0.305: R46.2 52.11,12.48 52.32,12.7 52.32,13.57 Q8.2(S)
MOSI  (via drill 0.33)
  Top 0.254: v29.34,33.27 28.7,33.91 26.54,33.91 23.75,36.7 23.75,40.89 22.86,41.78 22.86,43.31 22.99,43.43 24.38,43.43 25.4,44.45 26.04,44.45 27.3,43.18 28.57,43.18 28.83,42.93 34.29,42.93 34.8,43.43 34.8,43.81 35.69,44.7 38.1,44.7 38.35,44.45 52.45,44.45 53.09,43.81 J9.4 | v56.9,13.34 56.9,17.4 57.4,17.91 57.4,30.99 v58.04,31.62
  Bottom 0.254: v56.9,13.34 56.01,13.34 Q9.2(S) | v58.04,31.62 58.67,32.26 58.67,45.85 57.02,47.5 55.12,47.5 55.12,44.96 J9.4 | U7.15 29.34,32.8 v29.34,33.27
  Bottom 0.305: R49.2 55.92,13.61 Q9.2(S)
N$1
  Bottom 0.254: Q6.3(D) 36.58,43.43 33.91,46.1 33.4,46.1 32.26,47.24 31.75,47.24 | 31.75,47.24 30.48,47.24 29.08,48.64 28.07,48.64 27.3,47.88 27.18,47.88 12.06,48.01 10.67,46.61 R40.1 | 31.75,47.24 R38.2
N$2  (via drill 0.33)
  Top 0.254: v30.35,48.64 30.86,48.13 v33.27,48.13
  Bottom 0.254: Q5.3(D) 34.29,47.37 R37.2 34.04,47.37 v33.27,48.13 | v30.35,48.64 29.59,49.4 27.81,49.4 27.18,48.77 26.92,48.77 R39.1
N$3
  Bottom 0.254: TP4.TP 35.05,24.26 35.05,28.7 34.67,29.08 U7.7
N$4
  Bottom 0.813: J1.1 7.95,37.39 F1.1 C1.1
N$5
  Bottom 0.813: F1.2 7.36,34.54 5.04,32.22 4.15,32.22 3.81,31.88 2.92,31.88 L1.1
N$6  (via drill 0.33)
  Top 0.254: D3.A 2.79,25.91 2.16,25.27 v2.16,24.77
  Bottom 0.254: v2.16,24.77 2.16,25.27 2.79,25.91 D3.A
N$7  (via drill 0.33)
  Top 0.254: v15.11,34.16 14.99,34.16 12.57,31.75 11.3,31.75 10.54,30.99 10.54,30.48 6.1,26.04 6.1,25.27 4.83,24 D2.K
  Bottom 0.254: v15.11,34.16 16.76,34.16 17.4,34.8 21.59,34.8 22.61,35.81 22.61,37.34 22.86,37.59 22.86,38.61 U1.10
N$8  (via drill 0.33)
  Top 0.254: v10.03,35.18 9.78,34.92 9.78,30.86 4.83,25.91 D3.K
  Bottom 0.254: v10.03,35.18 9.53,35.18 8.76,35.94 5.33,35.94 4.83,36.45 4.83,40.13 3.43,41.53 3.43,42.55 5.59,44.7 14.48,44.7 16.7,42.48 U1.17
N$9
  Bottom 0.254: TP5.TP 33.02,27.56 34.04,28.57 U7.8
N$10
  Bottom 0.254: R30.2 48.77,48.13 48.77,46.99 50.55,46.99 R31.2 U3.6
N$11
  Bottom 0.305: R32.2 32.64,9.4 34.04,10.79 34.04,11.89 Q4.3(D) 33.99,13.16 34.99,14.16 U6.3
N$12
  Bottom 0.305: U1.12 14.5,39.31 R1.2
N$13
  Bottom 0.305: U1.11 14.03,38.67 12.95,39.75 R12.2
N$14  (via drill 0.33)
  Top 0.254: v5.33,18.16 D4.A
  Bottom 0.254: R25.1 5.08,18.41 v5.33,18.16
N$15
  Bottom 0.254: Q2.1(G) 13.69,8.83 R10.1
N$16  (via drill 0.33)
  Top 0.254: D2.A 2.79,23.24 2.67,23.24 2.16,22.73 v2.16,22.1
  Bottom 0.254: v2.16,22.1 2.16,22.73 2.79,23.37 D2.A
N$18  (via drill 0.33)
  Top 0.254: v25.27,21.84 25.15,21.84 25.02,21.97 17.27,21.97 16.64,21.34 16.64,19.68 17.4,18.92 17.4,12.19 17.53,12.06 v17.53,10.79
  Bottom 0.254: 17.53,9.78 19.05,9.78 U2.3 | v25.27,21.84 25.27,23.5 26.54,24.77 R8.1 | 17.53,9.78 v17.53,10.79 | 17.53,9.78 Q2.3(D)
N$19
  Bottom 0.305: R15.1 17.14,15.62 17.4,15.88 17.4,16.34 R18.1 17.69,17.69 18.41,18.41 18.86,18.41 U4.1
N$20
  Bottom 0.305: U4.3 18.1,21.02 17.65,20.57 R17.1 17.02,20.45 17.02,20.11 15.58,18.66 Q3.3(D)
N$21
  Bottom 0.254: 16.26,24.13 15.75,24.13 15.11,23.5 15.11,22.86 14.86,22.61 13.59,22.61 12.83,23.37 11.81,23.37 11.43,22.99 11.43,20.95 11.68,20.7 R16.2
  Bottom 0.305: 16.26,24.13 R19.1 18.39,22.29 U4.4 | 11.72,20.07 R16.2
N$22
  Bottom 0.305: R16.1 12.13,18.07 Q3.1(G)
N$23
  Bottom 0.254: 52.96,26.67 50.55,26.67 49.66,25.78 49.66,24.13 49.78,24 49.78,16 49.91,15.88 Q7.3(D) | 52.96,26.67 R44.1 52.96,26.29 | 52.96,26.67 R43.2
N$24
  Bottom 0.254: C14.1 16.64,30.86 U5.4
N$25
  Bottom 0.305: Q4.1(G) 32.7,10.99 32.89,11.18 R29.2
N$26
  Bottom 0.813: L1.2 3.72,29.88 4.57,30.73 C2.1 5.59,30.73 6.92,32.06 Q1.2(S)
N$27
  Bottom 0.305: R2.1 4.19,27.94 C2.2 5.84,28.96 C3.2 7.16,29 Q1.1(G)
N$29  (via drill 0.33)
  Top 0.254: v57.66,34.54 57.66,33.15 D7.A
  Bottom 0.254: v57.66,34.54 57.66,33.02 R45.2
N$30
  Bottom 0.254: Q9.3(D) 56.9,15.88 58.8,17.78 58.8,24.77 57.53,26.04 R51.1 57.53,28.19 57.15,28.57 R50.2
N$33  (via drill 0.33)
  Top 0.254: v55.88,22.86 55.88,23.24 54.36,24.77 v54.36,25.15
  Bottom 0.254: v55.88,22.86 56.13,22.61 57.28,22.61 58.04,21.84 58.04,18.16 57.15,17.27 56.64,17.27 56.01,16.64 56.01,16.38 55.5,15.88 53.34,15.88 Q8.3(D) | v54.36,25.15 55.37,26.16 R48.1 55.24,26.16 55.24,28.45 55.12,28.57 R47.2
RPU_AREF
  Bottom 0.254: U7.20 29.08,37.03 29.08,37.72 28.7,38.1 C20.1
RX
  Bottom 0.254: J3.3 48.64,50.8 50.55,48.9 R31.1
RX_!RE
  Bottom 0.254: R28.1 40.51,22.48 38.99,24 38.99,26.67 38.86,26.8 38.86,28.07 38.99,28.19 38.99,30.99 38.48,31.5 38.01,31.5 U7.2
  Bottom 0.305: U6.2 36.89,12.89 37.47,13.46 37.47,16.13 39.24,17.91 39.24,19.81 40.64,21.21 40.6,21.25 R28.1 40.77,22.35
RX_DE  (via drill 0.33)
  Top 0.254: v35.94,39.5 37.21,40.77 39.24,40.77 39.75,41.27 39.75,42.55 40.89,43.69 48.01,43.69 v48.9,42.8 | v49.66,27.18 50.16,26.67 51.56,26.67 54.99,23.24 54.99,22.23 54.61,21.84 52.2,21.84 50.42,20.07 50.42,5.59 49.53,4.7 42.8,4.7 41.91,5.59 v39.24,5.59
  Bottom 0.254: v48.9,42.8 49.91,41.78 49.91,32.38 49.66,32.13 v49.66,27.18 | v39.24,5.59 38.1,5.59 37.34,4.83 32.64,4.83 R32.1 | U7.26 35.94,39.4 v35.94,39.5
RX_RPU  (via drill 0.33)
  Top 0.254: v47.5,35.94 46.61,35.05 43.69,35.05 43.18,34.54 v43.18,33.27
  Bottom 0.254: U3.5 49.28,38.35 48.77,37.85 48.26,37.85 48.01,37.59 48.01,36.45 v47.5,35.94 | 41.53,21.34 41.78,21.59 41.78,23.11 41.15,23.75 40.26,23.75 39.75,24.26 39.75,25.27 41.27,26.8 41.27,27.94 40.77,28.45 40.77,29.84 41.78,30.86 41.78,31.11 42.93,32.26 42.93,33.02 v43.18,33.27
  Bottom 0.305: R27.1 39.66,8.47 37.59,10.54 37.59,11.3 37.27,11.62 | U6.1 37.27,11.62 | 37.27,11.62 37.27,12.26 38.23,13.21 38.23,15.88 40.01,17.65 40.01,19.56 41.53,21.08 41.53,21.34
SCK  (via drill 0.33)
  Top 0.254: v26.8,29.59 27.69,28.7 29.97,28.7 30.1,28.83 31.24,28.83 32.13,27.94 38.73,27.94 39.62,28.83 40.39,28.83 41.15,28.07 v44.2,28.07 | J9.3 55.12,45.21 40.77,45.21 39.62,46.35 35.31,46.35 34.42,45.47 32.89,45.47 31.88,44.45 27.81,44.45 26.54,45.72 24.89,45.72 23.88,44.7 21.72,44.7 18.54,41.53 18.54,39.88 16.76,38.1 16.76,37.34 17.14,36.96 17.91,36.96 18.41,37.47 18.41,37.59 21.97,41.15 22.61,41.15 23.11,40.64 23.11,36.32 25.27,34.16 25.27,32.64 26.16,31.75 v26.42,31.75
  Bottom 0.254: 26.92,31.75 26.92,33.66 27.94,34.67 U7.17 | 26.92,31.75 26.8,31.62 v26.8,29.59 | v44.2,28.07 44.07,27.94 44.07,24.89 44.96,24 44.96,22.99 45.47,22.48 46.48,22.48 48.9,20.07 48.9,13.72 Q7.2(S) | 26.92,31.75 v26.42,31.75
  Bottom 0.305: R42.2 48.55,11.47 48.9,11.81 48.9,13.57 Q7.2(S)
SCL
  Bottom 0.254: J5.1 3.56,50.55 7.49,46.61 R40.2
SCL0  (via drill 0.33)
  Top 0.254: v36.32,38.23 38.1,40.01 39.5,40.01 40.64,41.15 v40.64,41.4
  Bottom 0.254: 40.64,42.55 42.04,42.55 R36.2 | 40.64,42.55 40.26,42.55 Q6.2(S) 40.64,42.55 | v36.32,38.23 36.32,37.59 35.81,37.08 U7.28 | 40.64,42.55 v40.64,41.4
SCL1
  Bottom 0.254: U7.6 35.81,29.16 35.81,25.78 TP7.TP
SDA
  Bottom 0.254: J5.2 6.1,50.16 7.62,48.64 R39.2
SDA0  (via drill 0.33)
  Top 0.254: v33.02,44.45 33.27,44.7 34.67,44.7 35.56,45.59 39.12,45.59 v39.24,45.47
  Bottom 0.254: R35.2 42.04,46.48 40.26,46.48 Q5.2(S) 40.13,46.35 v39.24,45.47 | v33.02,44.45 32.89,44.32 32.89,38.99 33.02,38.86 33.02,37.85 33.78,37.08 34.42,37.08 34.8,37.47 35.18,37.47 U7.27
SDA1  (via drill 0.33)
  Top 0.254: v39.12,32.64 v36.32,32.64
  Bottom 0.254: v36.32,32.64 36.32,32 36.83,31.5 U7.3 | v39.12,32.64 40.01,31.75 TP6.TP
SS  (via drill 0.33)
  Top 0.254: v31.11,35.43 31.5,35.81 33.15,35.81 33.27,35.94 37.59,35.94 38.1,35.43 43.05,35.43 43.56,35.94 v46.23,35.94 | v17.65,7.11 19.68,7.11 19.94,6.86 v29.84,6.86 | v48.51,22.48 49.66,21.34 49.66,7.37 v47.88,5.59
  Bottom 0.254: D6.A 47.37,44.32 | 47.37,44.32 C19.2 | v31.11,35.43 31.11,33.4 29.21,31.5 U7.14 | 47.37,44.32 47.37,42.93 47.88,42.42 47.88,40.77 47.37,40.26 47.37,37.08 v46.23,35.94 47.37,34.8 47.37,32.89 46.74,32.26 46.74,28.96 46.48,28.7 46.48,24.26 48.26,22.48 v48.51,22.48 | J7.6 17.65,2.67 v17.65,7.11 | v29.84,6.86 32.64,4.06 43.05,4.06 44.58,5.59 v47.88,5.59
TX  (via drill 0.33, 0.41)
  Top 0.254: v15.11,46.86 15.11,43.69 15.49,43.31 15.49,40.39 14.22,39.12 14.22,34.29 12.45,32.51 11.18,32.51 10.92,32.77 10.92,35.69 10.41,36.2 9.65,36.2 8.76,35.31 8.76,30.99 5.21,27.43 1.91,27.43 1.27,26.8 1.27,21.46 2.03,20.7 4.32,20.7 6.48,18.54 9.53,18.54 10.29,17.78 11.94,17.78 14.86,14.86 R11.2 | 14.86,14.61 14.86,13.97 14.1,13.21 14.1,5.97 v14.35,5.71 | v22.86,46.99 24,48.13 26.67,48.13 28.07,49.53 33.91,49.53 34.67,48.77 40.64,48.77 41.78,47.62 v44.07,47.62
  Top 0.305: 14.86,14.61 R11.2
  Bottom 0.254: J3.4 44.07,49.15 v44.07,47.62 44.07,43.69 44.45,43.31 44.45,42.29 44.2,42.04 U3.1 | R10.2 13.59,6.48 v14.35,5.71 | v15.11,46.86 15.62,47.37 22.48,47.37 v22.86,46.99
TX_!RE  (via drill 0.33)
  Top 0.254: v33.91,43.81 33.78,43.56 29.08,43.56 28.83,43.81 27.56,43.81 26.29,45.09 25.15,45.09 24.13,44.07 22.48,44.07 22.23,43.81 22.23,42.42 17.65,37.85 v17.53,37.85 | v10.41,19.05 10.16,19.3 6.73,19.3 5.46,20.57 5.46,22.23 6.1,22.86 6.1,24.13 v7.11,25.15
  Bottom 0.254: v33.91,43.81 33.91,43.43 33.53,43.05 33.53,39.5 33.91,39.12 33.91,38.86 34.04,38.73 U7.25 | v17.53,37.85 12.06,37.85 12.06,34.29 11.81,34.04 11.81,31.88 11.3,31.37 11.05,31.37 10.54,30.86 10.54,30.1 10.79,29.84 11.05,29.84 11.3,29.59 11.3,27.3 10.67,26.67 8.64,26.67 v7.11,25.15 | U2.2 18.1,8.57 17.78,8.89 16.51,8.89 16.38,9.02 16.38,9.4 16,9.78 14.61,9.78 14.48,9.91 13.34,9.91 12.7,10.54 12.7,15.24 10.41,17.53 v10.41,19.05
  Bottom 0.305: R6.2 23.15,5.55 22.1,6.6 21.59,6.6 19.62,8.57 U2.2
TX_DE  (via drill 0.33)
  Top 0.254: v31.37,27.18 31.11,27.18 30.35,26.42 v29.72,26.42
  Bottom 0.254: v31.37,27.18 31.37,28.07 31.88,28.57 U7.9 | v29.72,26.42 28.57,25.27 28.57,24.77 R8.2
TX_RPU  (via drill 0.33)
  Top 0.254: v45.85,23.5 44.45,22.1 44.07,22.1 43.31,21.34 43.31,20.07 42.67,19.43 39.88,19.43 38.21,21.1 arc45 36.41,21.84 36.1,21.84 arc45 34.31,21.1 33.66,20.45 26.8,20.45 26.16,21.08 24.77,21.08 24.51,21.34 18.03,21.34 17.65,20.95 17.65,19.81 18.03,19.43 18.03,14.73 18.54,14.22 v18.54,12.19
  Bottom 0.254: U3.2 45.47,35.43 46.1,34.8 46.1,29.08 45.85,28.83 v45.85,23.5 | v18.54,12.19 18.92,11.81 19.05,11.81
  Bottom 0.305: U2.4 19.05,11.81 19.94,12.7 R9.2
USB5V_ADC6  (via drill 0.33)  (1 unrouted)
  Top 0.254: v28.19,36.83 28.19,34.67 v26.8,34.67 | v23.75,32 23.75,31.5 21.72,29.46 15.49,29.46 13.08,27.05 11.56,27.05 11.05,26.54 11.05,25.78 11.94,24.89 11.94,23.37 9.91,21.34 v7.49,21.34
  Bottom 0.254: 6.73,20.19 C5.1 | v28.19,36.83 29.08,35.94 | v23.75,32 24.13,32 v26.8,34.67 | 6.73,20.19 6.73,20.57 | 6.73,20.57 v7.49,21.34 | 6.73,20.19 R4.1 6.73,20.57 | 6.73,20.57 R3.1
VIN  (via drill 0.41)
  Top 0.61: J7.1 30.48,3.56 29.72,4.32 23.88,4.32 22.48,5.71 19.81,5.71 19.3,6.22 15.62,6.22 15.11,6.73 15.11,12.45 16.51,13.84 16.51,15.88 14.22,18.16 v14.22,23.37
  Bottom 0.61: v14.22,23.37 14.22,24.68 R21.1 14.31,25.65 | 14.31,25.65 14.31,26.33 13.68,26.96 D1.K 15.49,28.19 15.59,28.29 U5.3 | U5.1 18.6,26.86 17.4,25.65 14.31,25.65
VIN_ADC7  (via drill 0.33)  (1 unrouted)
  Top 0.254: v32.64,29.97 32.38,29.97 32,30.35 25.78,30.35 23.24,27.81 20.19,27.81 19.3,28.7 15.75,28.7 v13.21,26.16
  Bottom 0.254: C13.1 10.41,24.77 R22.1 R21.2 12.45,24.77 12.45,25.4 v13.21,26.16 | 30.86,37.47 31.88,36.45 31.88,30.48 32.38,29.97 v32.64,29.97

## Text on the board
tPlace: SCL | SDA | 10 | AREF | 0V | 13 | 12 | 11 | 9 | 8 | 7 | 6 | 5 | 4 | 3 | 2 | TX | RX | 22 | 14 | !RST | 0V | FTDI_RX | SCK | MNG_ICSP | MOSI | MISO | RPUftdi | FTDI_!DTR | 3V3 | FTDI_!DSR | RESET / DISABLE | FTDI_!CTS | FTDI_3V3 | FTDI / _!RTS | MNG_LED | RD | EPCCS.ORG | MISO | !DTR | 14145^2 | IOREF | SCK | USBRX | SDA1 | MOSI | !RESET | YE | FTDI_TX | XTAL2 | 0V | RD | RPU 100Ω / TERMINATIONS | XTAL1 | SCL1 | USBTX | GN | 5V | +RX | -RX | +DTR | -DTR | +TX | -TX | !RESET | IOREF | 3V3 | 5V | 0V | 0V | VIN | ADC0 | ADC2 | ADC4 | ADC6 | 0V | AREF | ADC1 | ADC3 | ADC5 | ADC7